# Allegro board demob2.brd
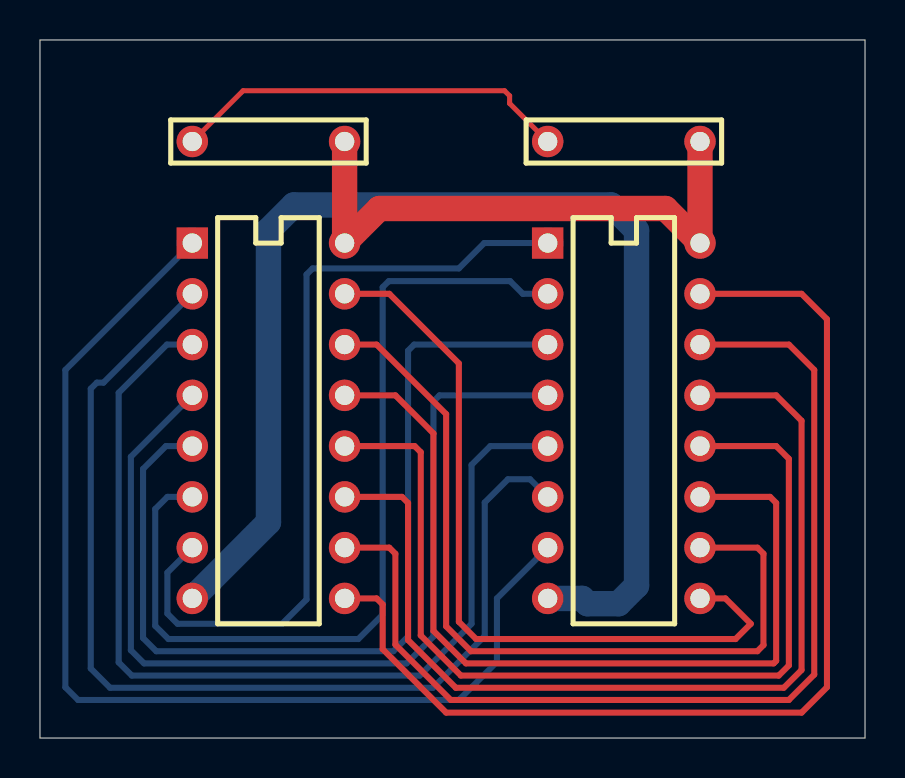
[diagram p0: board, top side]
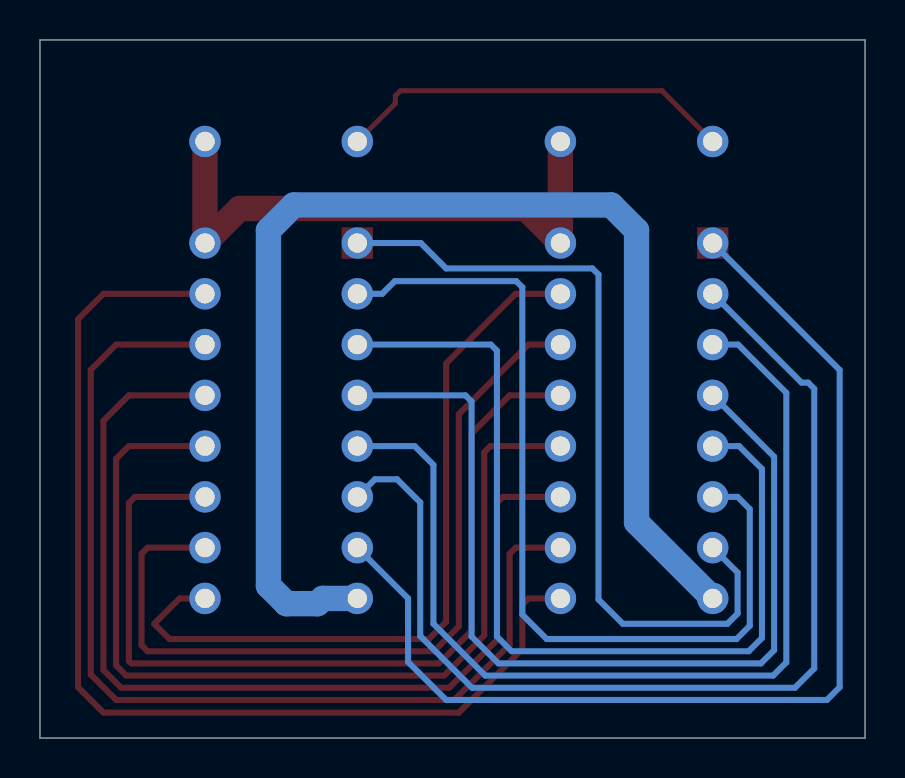
[diagram p1: board, bottom side, seen from below]

Outline 41.27 x 34.93 mm; copper layers: TOP, GND, POWER, INNER1, INNER2, BOTTOM. Coordinates in mm from the lower left corner of the outline.
Outline path: 0,34.93 41.27,34.93 41.27,0 0,0 0,34.93

## Design rules (mm)
nets with their own width: min track width 0.254; nets GND_SIGNAL
nets with their own width: min track width 0.305; nets N01899 N01900 N01901 N01902 N01903 N01904 N01905 N01906 N01907 N01908 N01909 N01910 N01911 N01912
nets with their own width: min track width 1.27; nets GND VCC

## Placement (name value [footprint] x y rotation side)
C1  CAP NP  [AC300100A]  15.24 29.85 180 top
C2  CAP NP  [AC300100A]  33.02 29.85 180 top
U1  74LS158  [DIP16]  7.62 24.77 270 top
U2  74LS158  [DIP16]  25.4 24.77 270 top

## Library data of the parts
C1 C2 = CAP_NP
U1 U2 = 74LS158

## Footprints (pads in the part's own frame, mm; a bottom-side part is the same pattern mirrored in y, then rotated)
AC300100A
  round 1.575 hole 0.965: 1(0,0) 2(7.62,0)
DIP16
  rect 1.575x1.575 hole 0.965: 1(0,0)
  round 1.575 hole 0.965: 2(2.54,0) 3(5.08,0) 4(7.62,0) 5(10.16,0) 6(12.7,0) 7(15.24,0) 8(17.78,0) 9(17.78,7.62) 10(15.24,7.62) 11(12.7,7.62) 12(10.16,7.62) 13(7.62,7.62) 14(5.08,7.62) 15(2.54,7.62) 16(0,7.62)

## Nets
GND: U1.8(TP-8) U2.8(TP-8)
GND_SIGNAL: C1.2(TP-2) C2.2(TP-2)
VCC: C1.1(TP-1) C2.1(TP-1) U1.16(TP-16) U2.16(TP-16)
N01899: U1.2(TP-2) U2.6(TP-6)
N01900: U1.3(TP-3) U2.5(TP-5)
N01901: U1.4(TP-4) U2.4(TP-4)
N01902: U1.5(TP-5) U2.3(TP-3)
N01903: U1.6(TP-6) U2.2(TP-2)
N01904: U1.7(TP-7) U2.1(TP-1)
N01905: U1.9(TP-9) U2.15(TP-15)
N01906: U1.10(TP-10) U2.14(TP-14)
N01907: U1.11(TP-11) U2.13(TP-13)
N01908: U1.12(TP-12) U2.12(TP-12)
N01909: U1.14(TP-14) U2.10(TP-10)
N01910: U1.1(TP-1) U2.7(TP-7)
N01911: U1.13(TP-13) U2.11(TP-11)
N01912: U1.15(TP-15) U2.9(TP-9)

## Routing (per net, layer and track width the routed paths; a pad name or vN(x,y) marks a point on that pad's centre or on a via; arc(x,y) is an arc through that point)
GND: length 62.2
  BOTTOM w1.27: U1.8 11.43,10.8 11.43,25.4 12.7,26.67 28.57,26.67 29.84,25.4 29.84,7.62 28.95,6.72 27.39,6.72 27.13,6.99 U2.8
GND_SIGNAL: length 20.1
  TOP w0.254: C1.2 10.16,32.39 23.24,32.39 23.5,32.13 23.5,31.75 C2.2
VCC: length 29.4
  TOP w1.27: C2.1 U2.16 31.29,26.49 16.97,26.49 U1.16 C1.1
N01899: length 52.9
  BOTTOM w0.305: U2.6 24.52,12.95 23.41,12.95 22.25,11.79 22.25,5.11 19.66,2.51 3.51,2.51 2.54,3.48 2.54,17.48 2.84,17.78 3.17,17.78 U1.2
N01900: length 49.3
  BOTTOM w0.305: U1.3 6.35,19.68 3.94,17.27 3.94,3.78 4.6,3.12 19,3.12 21.59,5.72 21.59,13.67 22.53,14.61 U2.5
N01901: length 47.6
  BOTTOM w0.305: U1.4 4.55,14.07 4.55,4.39 5.21,3.73 18.34,3.73 19.68,5.08 19.68,16.84 19.99,17.14 U2.4
N01902: length 46.6
  BOTTOM w0.305: U2.3 18.72,19.68 18.41,19.38 18.41,5.08 17.68,4.34 5.82,4.34 5.16,5 5.16,13.46 6.3,14.61 U1.5
N01903: length 45.1
  BOTTOM w0.305: U1.6 6.38,12.07 5.77,11.46 5.77,5.61 6.43,4.95 15.93,4.95 17.14,6.17 17.14,22.56 17.45,22.86 23.52,22.86 24.16,22.22 U2.2
N01904: length 40.5
  BOTTOM w0.305: U1.7 6.38,8.28 6.38,6.22 6.88,5.72 12.12,5.72 13.34,6.93 13.34,23.19 13.64,23.5 20.95,23.5 22.23,24.77 U2.1
N01905: length 53.6
  TOP w0.305: U2.15 38.1,22.22 39.37,20.95 39.37,2.54 38.1,1.27 20.32,1.27 17.14,4.45 17.14,6.68 16.84,6.99 U1.9
N01906: length 51.3
  TOP w0.305: U1.10 17.48,9.52 17.78,9.22 17.78,4.67 20.55,1.91 37.47,1.91 38.73,3.17 38.73,18.41 37.47,19.68 U2.14
N01907: length 49.3
  TOP w0.305: U2.13 36.83,17.14 38.1,15.88 38.1,3.4 37.21,2.51 20.8,2.51 18.41,4.9 18.41,11.76 18.11,12.07 U1.11
N01908: length 47.6
  TOP w0.305: U1.12 18.75,14.61 19.05,14.3 19.05,5.13 21.06,3.12 36.96,3.12 37.47,3.63 37.47,13.97 36.83,14.61 U2.12
N01909: length 41.5
  TOP w0.305: U2.10 35.89,9.52 36.2,9.22 36.2,4.65 35.89,4.34 21.56,4.34 20.32,5.59 20.32,16.21 16.84,19.68 U1.14
N01910: length 54.3
  BOTTOM w0.305: U1.1 1.27,18.41 1.27,2.54 1.91,1.91 20.95,1.91 22.86,3.81 22.86,6.99 U2.7
N01911: length 44.8
  TOP w0.305: U1.13 17.78,17.14 19.68,15.24 19.68,5.36 21.31,3.73 36.7,3.73 36.83,3.86 36.83,11.76 36.53,12.07 U2.11
N01912: length 38.4
  TOP w0.305: U1.15 17.48,22.22 20.95,18.75 20.95,5.82 21.82,4.95 34.8,4.95 35.56,5.72 34.29,6.99 U2.9
